# EAGLE board sodaled_panelized (EAGLE 6.3)
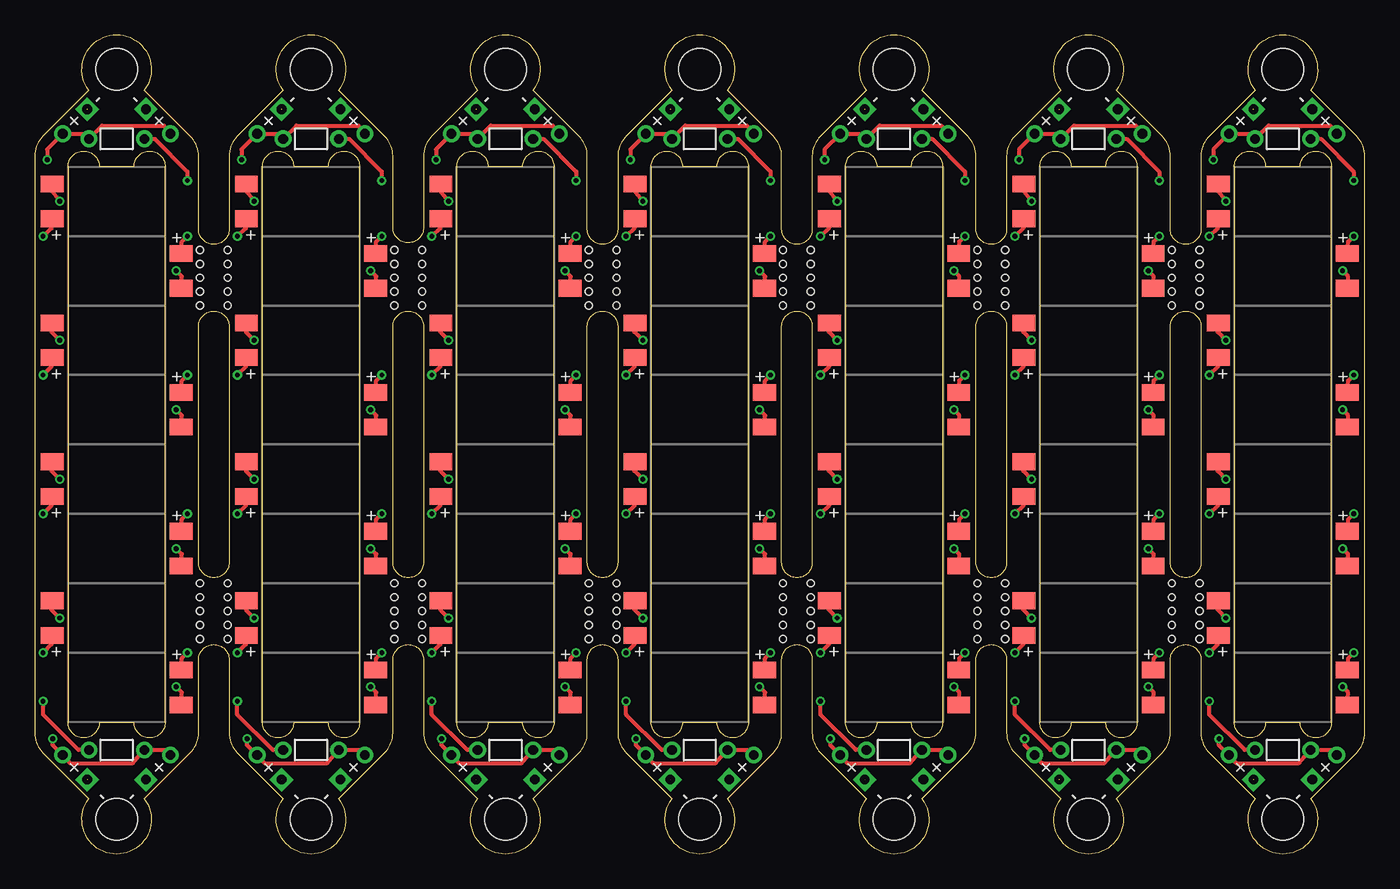
[diagram p0: board, top side]
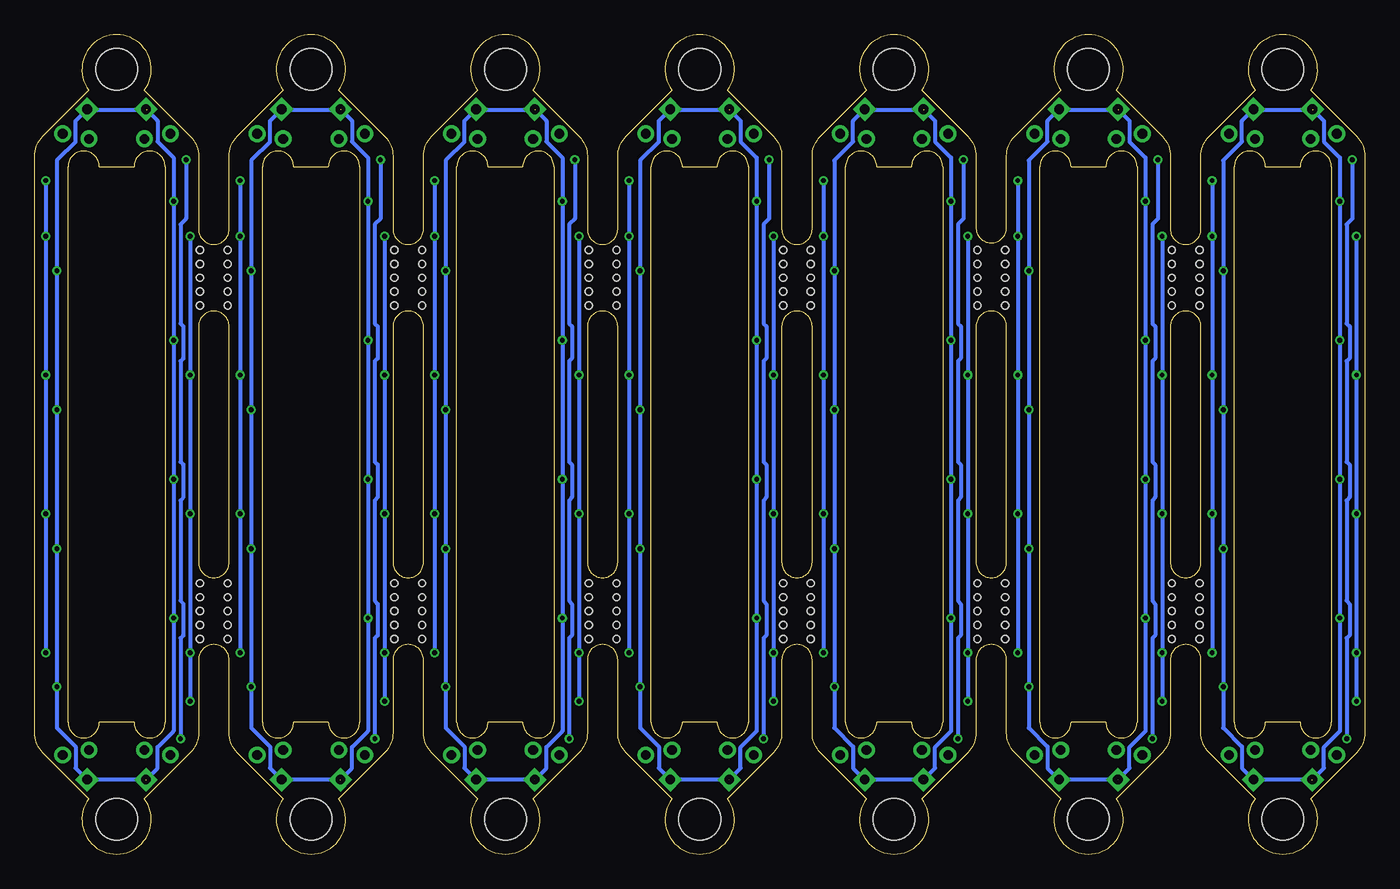
[diagram p1: board, bottom side, seen from below]

Size 95.8 x 59 mm. Coordinates in mm from the lower left corner, seen from the top.
Outline: 3.9,55 0.59,51.69 arc45 0,50.27 0,8.73 arc45 0.59,7.31 3.9,4 arc254 7.9,4 11.21,7.31 arc45 11.8,8.73 11.8,14 arc-180 14,14 14,8.73 arc45 14.59,7.31 17.9,4 arc254 21.9,4 25.21,7.31 arc45 25.8,8.73 25.8,14 arc-180 28,14 28,8.73 arc45 28.59,7.31 31.9,4 arc254 35.9,4 39.21,7.31 arc45 39.8,8.73 39.8,14 arc-180 42,14 42,8.73 arc45 42.59,7.31 45.9,4 arc254 49.9,4 53.21,7.31 arc45 53.8,8.73 53.8,14 arc-180 56,14 56,8.73 arc45 56.59,7.31 59.9,4 arc254 63.9,4 67.21,7.31 arc45 67.8,8.73 67.8,14 arc-180 70,14 70,8.73 arc45 70.59,7.31 73.9,4 arc254 77.9,4 81.21,7.31 arc45 81.8,8.73 81.8,14 arc-180 84,14 84,8.73 arc45 84.59,7.31 87.9,4 arc254 91.9,4 95.21,7.31 arc45 95.8,8.73 95.8,50.27 arc45 95.21,51.69 91.9,55 arc254 87.9,55 84.59,51.69 arc45 84,50.27 84,45 arc-180 81.8,45 81.8,50.27 arc45 81.21,51.69 77.9,55 arc254 73.9,55 70.59,51.69 arc45 70,50.27 70,45 arc-180 67.8,45 67.8,50.27 arc45 67.21,51.69 63.9,55 arc254 59.9,55 56.59,51.69 arc45 56,50.27 56,45 arc-180 53.8,45 53.8,50.27 arc45 53.21,51.69 49.9,55 arc254 45.9,55 42.59,51.69 arc45 42,50.27 42,45 arc-180 39.8,45 39.8,50.27 arc45 39.21,51.69 35.9,55 arc254 31.9,55 28.59,51.69 arc45 28,50.27 28,45.25 arc-180 25.8,45 25.8,50.27 arc45 25.21,51.69 21.9,55 arc254 17.9,55 14.59,51.69 arc45 14,50.27 14,45 arc-180 11.8,45 11.8,50.27 arc45 11.21,51.69 7.9,55 arc254 3.9,55
Outline: 11.8,21 11.8,38 arc-180 14,38 14,21 arc-180 11.8,21
Outline: 2.4,49.5 2.4,9.5 arc180 4.65,9.5 7.15,9.5 arc180 9.4,9.5 9.4,49.5 arc180 7.15,49.5 4.65,49.5 arc180 2.4,49.5
Outline: 25.8,21 25.8,38 arc-180 28,38 28,21 arc-180 25.8,21
Outline: 16.4,49.5 16.4,9.5 arc180 18.65,9.5 21.15,9.5 arc180 23.4,9.5 23.4,49.5 arc180 21.15,49.5 18.65,49.5 arc180 16.4,49.5
Outline: 39.8,21 39.8,38 arc-180 42,38 42,21 arc-180 39.8,21
Outline: 30.4,49.5 30.4,9.5 arc180 32.65,9.5 35.15,9.5 arc180 37.4,9.5 37.4,49.5 arc180 35.15,49.5 32.65,49.5 arc180 30.4,49.5
Outline: 53.8,21 53.8,38 arc-180 56,38 56,21 arc-180 53.8,21
Outline: 44.4,49.5 44.4,9.5 arc180 46.65,9.5 49.15,9.5 arc180 51.4,9.5 51.4,49.5 arc180 49.15,49.5 46.65,49.5 arc180 44.4,49.5
Outline: 67.8,21 67.8,38 arc-180 70,38 70,21 arc-180 67.8,21
Outline: 58.4,49.5 58.4,9.5 arc180 60.65,9.5 63.15,9.5 arc180 65.4,9.5 65.4,49.5 arc180 63.15,49.5 60.65,49.5 arc180 58.4,49.5
Outline: 81.8,21 81.8,38 arc-180 84,38 84,21 arc-180 81.8,21
Outline: 72.4,49.5 72.4,9.5 arc180 74.65,9.5 77.15,9.5 arc180 79.4,9.5 79.4,49.5 arc180 77.15,49.5 74.65,49.5 arc180 72.4,49.5
Outline: 86.4,49.5 86.4,9.5 arc180 88.65,9.5 91.15,9.5 arc180 93.4,9.5 93.4,49.5 arc180 91.15,49.5 88.65,49.5 arc180 86.4,49.5
Copper layers (1*16): Top 0.035mm / dielectric 1.5mm / Bottom 0.035mm
Design rules "ITEADstudio_DRC": minimum track width 6mil, minimum drill 12mil, track to track 6mil, track to pad 6mil, pad to pad 6mil, via to via 6mil, smd to smd 0mil, copper to edge 10mil, drill to drill 10mil, minimum pad ring 10mil, minimum via ring 6mil, stop-mask expansion 2mil, vias tented up to drill 100mil, thermal gap 10mil
Holes 3 mm at 5.9,2.5 5.9,56.5 19.9,2.5 19.9,56.5 33.9,2.5 33.9,56.5 47.9,2.5 47.9,56.5 61.9,2.5 61.9,56.5 75.9,2.5 75.9,56.5 89.9,2.5 89.9,56.5
Holes 0.5 mm at 11.9,15.5 11.9,16.5 11.9,17.5 11.9,18.5 11.9,19.5 13.9,15.5 13.9,16.5 13.9,17.5 13.9,18.5 13.9,19.5 11.9,39.5 11.9,40.5 11.9,41.5 11.9,42.5 11.9,43.5 13.9,39.5 13.9,40.5 13.9,41.5 13.9,42.5 13.9,43.5 25.9,15.5 25.9,16.5 25.9,17.5 25.9,18.5 25.9,19.5 27.9,15.5 27.9,16.5 27.9,17.5 27.9,18.5 27.9,19.5 25.9,39.5 25.9,40.5 25.9,41.5 25.9,42.5 25.9,43.5 27.9,39.5 27.9,40.5 27.9,41.5 27.9,42.5 27.9,43.5 39.9,15.5 39.9,16.5 39.9,17.5 39.9,18.5 39.9,19.5 41.9,15.5 41.9,16.5 41.9,17.5 41.9,18.5 41.9,19.5 39.9,39.5 39.9,40.5 39.9,41.5 39.9,42.5 39.9,43.5 41.9,39.5 41.9,40.5 41.9,41.5 41.9,42.5 41.9,43.5 53.9,15.5 53.9,16.5 53.9,17.5 53.9,18.5 53.9,19.5 55.9,15.5 55.9,16.5 55.9,17.5 55.9,18.5 55.9,19.5 53.9,39.5 53.9,40.5 53.9,41.5 53.9,42.5 53.9,43.5 55.9,39.5 55.9,40.5 55.9,41.5 55.9,42.5 55.9,43.5 67.9,15.5 67.9,16.5 67.9,17.5 67.9,18.5 67.9,19.5 69.9,15.5 69.9,16.5 69.9,17.5 69.9,18.5 69.9,19.5 67.9,39.5 67.9,40.5 67.9,41.5 67.9,42.5 67.9,43.5 69.9,39.5 69.9,40.5 69.9,41.5 69.9,42.5 69.9,43.5 81.9,15.5 81.9,16.5 81.9,17.5 81.9,18.5 81.9,19.5 83.9,15.5 83.9,16.5 83.9,17.5 83.9,18.5 83.9,19.5 81.9,39.5 81.9,40.5 81.9,41.5 81.9,42.5 81.9,43.5 83.9,39.5 83.9,40.5 83.9,41.5 83.9,42.5 83.9,43.5

## Footprints (pad centres in the part's own frame; a part is rotated, then mirrored left to right if it is on the bottom)
LED_RECT_SIDEMOUNT = smd 1.65 x 1.2: A -4.65,-1.25; C -4.65,1.25
1X02 = drill 0.7 square: P$1 -1.25,0 | drill 0.7: P$2 1.25,0
RESISTOR_CFM1 = drill 0.7: P$1 2,0; P$2 -2,0

## Placement (x,y rotation side)
LED1  [LED_RECT_SIDEMOUNT]  5.9,47 0 top
LED2  [LED_RECT_SIDEMOUNT]  5.9,42 180 top
LED3  [LED_RECT_SIDEMOUNT]  5.9,37 0 top
LED4  [LED_RECT_SIDEMOUNT]  5.9,32 180 top
LED5  [LED_RECT_SIDEMOUNT]  5.9,27 0 top
LED6  [LED_RECT_SIDEMOUNT]  5.9,22 180 top
LED7  [LED_RECT_SIDEMOUNT]  5.9,17 0 top
LED8  [LED_RECT_SIDEMOUNT]  5.9,12 180 top
LED9  [LED_RECT_SIDEMOUNT]  19.9,47 0 top
LED10  [LED_RECT_SIDEMOUNT]  19.9,42 180 top
LED11  [LED_RECT_SIDEMOUNT]  19.9,37 0 top
LED12  [LED_RECT_SIDEMOUNT]  19.9,32 180 top
LED13  [LED_RECT_SIDEMOUNT]  19.9,27 0 top
LED14  [LED_RECT_SIDEMOUNT]  19.9,22 180 top
LED15  [LED_RECT_SIDEMOUNT]  19.9,17 0 top
LED16  [LED_RECT_SIDEMOUNT]  19.9,12 180 top
LED17  [LED_RECT_SIDEMOUNT]  33.9,47 0 top
LED18  [LED_RECT_SIDEMOUNT]  33.9,42 180 top
LED19  [LED_RECT_SIDEMOUNT]  33.9,37 0 top
LED20  [LED_RECT_SIDEMOUNT]  33.9,32 180 top
LED21  [LED_RECT_SIDEMOUNT]  33.9,27 0 top
LED22  [LED_RECT_SIDEMOUNT]  33.9,22 180 top
LED23  [LED_RECT_SIDEMOUNT]  33.9,17 0 top
LED24  [LED_RECT_SIDEMOUNT]  33.9,12 180 top
LED25  [LED_RECT_SIDEMOUNT]  47.9,47 0 top
LED26  [LED_RECT_SIDEMOUNT]  47.9,42 180 top
LED27  [LED_RECT_SIDEMOUNT]  47.9,37 0 top
LED28  [LED_RECT_SIDEMOUNT]  47.9,32 180 top
LED29  [LED_RECT_SIDEMOUNT]  47.9,27 0 top
LED30  [LED_RECT_SIDEMOUNT]  47.9,22 180 top
LED31  [LED_RECT_SIDEMOUNT]  47.9,17 0 top
LED32  [LED_RECT_SIDEMOUNT]  47.9,12 180 top
LED33  [LED_RECT_SIDEMOUNT]  61.9,47 0 top
LED34  [LED_RECT_SIDEMOUNT]  61.9,42 180 top
LED35  [LED_RECT_SIDEMOUNT]  61.9,37 0 top
LED36  [LED_RECT_SIDEMOUNT]  61.9,32 180 top
LED37  [LED_RECT_SIDEMOUNT]  61.9,27 0 top
LED38  [LED_RECT_SIDEMOUNT]  61.9,22 180 top
LED39  [LED_RECT_SIDEMOUNT]  61.9,17 0 top
LED40  [LED_RECT_SIDEMOUNT]  61.9,12 180 top
LED41  [LED_RECT_SIDEMOUNT]  75.9,47 0 top
LED42  [LED_RECT_SIDEMOUNT]  75.9,42 180 top
LED43  [LED_RECT_SIDEMOUNT]  75.9,37 0 top
LED44  [LED_RECT_SIDEMOUNT]  75.9,32 180 top
LED45  [LED_RECT_SIDEMOUNT]  75.9,27 0 top
LED46  [LED_RECT_SIDEMOUNT]  75.9,22 180 top
LED47  [LED_RECT_SIDEMOUNT]  75.9,17 0 top
LED48  [LED_RECT_SIDEMOUNT]  75.9,12 180 top
LED49  [LED_RECT_SIDEMOUNT]  89.9,47 0 top
LED50  [LED_RECT_SIDEMOUNT]  89.9,42 180 top
LED51  [LED_RECT_SIDEMOUNT]  89.9,37 0 top
LED52  [LED_RECT_SIDEMOUNT]  89.9,32 180 top
LED53  [LED_RECT_SIDEMOUNT]  89.9,27 0 top
LED54  [LED_RECT_SIDEMOUNT]  89.9,22 180 top
LED55  [LED_RECT_SIDEMOUNT]  89.9,17 0 top
LED56  [LED_RECT_SIDEMOUNT]  89.9,12 180 top
U$1  M02  [1X02]  2.9,6.25 135 top
U$2  M02  [1X02]  8.9,6.25 45 top
U$3  M02  [1X02]  2.9,52.75 225 top
U$4  M02  [1X02]  8.9,52.75 315 top
U$5  M02  [1X02]  16.9,6.25 135 top
U$6  M02  [1X02]  22.9,6.25 45 top
U$7  120R  [RESISTOR_CFM1]  5.9,7.5 0 top
U$8  120R  [RESISTOR_CFM1]  5.9,51.5 180 top
U$9  M02  [1X02]  16.9,52.75 225 top
U$10  M02  [1X02]  22.9,52.75 315 top
U$11  120R  [RESISTOR_CFM1]  19.9,7.5 0 top
U$12  120R  [RESISTOR_CFM1]  19.9,51.5 180 top
U$13  M02  [1X02]  30.9,6.25 135 top
U$14  M02  [1X02]  36.9,6.25 45 top
U$15  M02  [1X02]  30.9,52.75 225 top
U$16  M02  [1X02]  36.9,52.75 315 top
U$17  120R  [RESISTOR_CFM1]  33.9,7.5 0 top
U$18  120R  [RESISTOR_CFM1]  33.9,51.5 180 top
U$19  M02  [1X02]  44.9,6.25 135 top
U$20  M02  [1X02]  50.9,6.25 45 top
U$21  M02  [1X02]  44.9,52.75 225 top
U$22  M02  [1X02]  50.9,52.75 315 top
U$23  120R  [RESISTOR_CFM1]  47.9,7.5 0 top
U$24  120R  [RESISTOR_CFM1]  47.9,51.5 180 top
U$25  M02  [1X02]  58.9,6.25 135 top
U$26  M02  [1X02]  64.9,6.25 45 top
U$27  M02  [1X02]  58.9,52.75 225 top
U$28  M02  [1X02]  64.9,52.75 315 top
U$29  120R  [RESISTOR_CFM1]  61.9,7.5 0 top
U$30  120R  [RESISTOR_CFM1]  61.9,51.5 180 top
U$31  M02  [1X02]  72.9,6.25 135 top
U$32  M02  [1X02]  78.9,6.25 45 top
U$33  M02  [1X02]  72.9,52.75 225 top
U$34  M02  [1X02]  78.9,52.75 315 top
U$35  120R  [RESISTOR_CFM1]  75.9,7.5 0 top
U$36  120R  [RESISTOR_CFM1]  75.9,51.5 180 top
U$37  M02  [1X02]  86.9,6.25 135 top
U$38  M02  [1X02]  92.9,6.25 45 top
U$39  M02  [1X02]  86.9,52.75 225 top
U$40  M02  [1X02]  92.9,52.75 315 top
U$41  120R  [RESISTOR_CFM1]  89.9,7.5 0 top
U$42  120R  [RESISTOR_CFM1]  89.9,51.5 180 top

## Library data of the parts
LED1-LED56 U$1-U$42 = tiago

## Nets
7.4V: U$1.P$2 U$2.P$2 U$3.P$2 U$4.P$2 U$7.P$1 U$8.P$1
7.4V1: U$5.P$2 U$6.P$2 U$9.P$2 U$10.P$2 U$11.P$1 U$12.P$1
7.4V2: U$13.P$2 U$14.P$2 U$15.P$2 U$16.P$2 U$17.P$1 U$18.P$1
7.4V3: U$19.P$2 U$20.P$2 U$21.P$2 U$22.P$2 U$23.P$1 U$24.P$1
7.4V4: U$25.P$2 U$26.P$2 U$27.P$2 U$28.P$2 U$29.P$1 U$30.P$1
7.4V5: U$31.P$2 U$32.P$2 U$33.P$2 U$34.P$2 U$35.P$1 U$36.P$1
7.4V6: U$37.P$2 U$38.P$2 U$39.P$2 U$40.P$2 U$41.P$1 U$42.P$1
GND: LED1.C LED2.C LED3.C LED4.C LED5.C LED6.C LED7.C LED8.C U$1.P$1 U$2.P$1 U$3.P$1 U$4.P$1
GND1: LED9.C LED10.C LED11.C LED12.C LED13.C LED14.C LED15.C LED16.C U$5.P$1 U$6.P$1 U$9.P$1 U$10.P$1
GND2: LED17.C LED18.C LED19.C LED20.C LED21.C LED22.C LED23.C LED24.C U$13.P$1 U$14.P$1 U$15.P$1 U$16.P$1
GND3: LED25.C LED26.C LED27.C LED28.C LED29.C LED30.C LED31.C LED32.C U$19.P$1 U$20.P$1 U$21.P$1 U$22.P$1
GND4: LED33.C LED34.C LED35.C LED36.C LED37.C LED38.C LED39.C LED40.C U$25.P$1 U$26.P$1 U$27.P$1 U$28.P$1
GND5: LED41.C LED42.C LED43.C LED44.C LED45.C LED46.C LED47.C LED48.C U$31.P$1 U$32.P$1 U$33.P$1 U$34.P$1
GND6: LED49.C LED50.C LED51.C LED52.C LED53.C LED54.C LED55.C LED56.C U$37.P$1 U$38.P$1 U$39.P$1 U$40.P$1
N$1: LED9.A LED11.A LED13.A LED15.A U$11.P$2
N$2: LED1.A LED3.A LED5.A LED7.A U$7.P$2
N$3: LED2.A LED4.A LED6.A LED8.A U$8.P$2
N$4: LED10.A LED12.A LED14.A LED16.A U$12.P$2
N$5: LED17.A LED19.A LED21.A LED23.A U$17.P$2
N$6: LED18.A LED20.A LED22.A LED24.A U$18.P$2
N$7: LED25.A LED27.A LED29.A LED31.A U$23.P$2
N$8: LED26.A LED28.A LED30.A LED32.A U$24.P$2
N$9: LED33.A LED35.A LED37.A LED39.A U$29.P$2
N$10: LED34.A LED36.A LED38.A LED40.A U$30.P$2
N$11: LED41.A LED43.A LED45.A LED47.A U$35.P$2
N$12: LED42.A LED44.A LED46.A LED48.A U$36.P$2
N$13: LED49.A LED51.A LED53.A LED55.A U$41.P$2
N$14: LED50.A LED52.A LED54.A LED56.A U$42.P$2

## Tracks (layer width: path | path; a pad name or v marks a point on that pad's centre or on a via)
7.4V  (via drill 0.35)
  Top 0.305: v0.9,50 0.9,50.75 U$3.P$2 3.43,51.87 U$8.P$1 4.85,52.45 9.3,52.45 9.78,51.97 U$4.P$2 | v1.3,8.3 1.3,7.85 U$1.P$2 2.55,6.55 7.05,6.55 7.9,7.55 U$7.P$1 9.42,7.5 U$2.P$2
  Bottom 0.305: v0.9,50 0.9,45.75 1.3,45.35 1.3,38.2 1.1,38 1.1,35.7 1.3,35.5 1.3,28.25 1.1,28.05 1.1,25.7 1.3,25.45 1.3,18.25 1.1,18 1.1,15.75 1.3,15.55 v1.3,8.3
7.4V1  (via drill 0.35)
  Top 0.305: v14.9,50 14.9,50.75 U$9.P$2 17.43,51.87 U$12.P$1 18.85,52.45 23.3,52.45 23.78,51.97 U$10.P$2 | v15.3,8.3 15.3,7.85 U$5.P$2 16.55,6.55 21.05,6.55 21.9,7.55 U$11.P$1 23.42,7.5 U$6.P$2
  Bottom 0.305: v14.9,50 14.9,45.75 15.3,45.35 15.3,38.2 15.1,38 15.1,35.7 15.3,35.5 15.3,28.25 15.1,28.05 15.1,25.7 15.3,25.45 15.3,18.25 15.1,18 15.1,15.75 15.3,15.55 v15.3,8.3
7.4V2  (via drill 0.35)
  Top 0.305: v28.9,50 28.9,50.75 U$15.P$2 31.43,51.87 U$18.P$1 32.85,52.45 37.3,52.45 37.78,51.97 U$16.P$2 | v29.3,8.3 29.3,7.85 U$13.P$2 30.55,6.55 35.05,6.55 35.9,7.55 U$17.P$1 37.42,7.5 U$14.P$2
  Bottom 0.305: v28.9,50 28.9,45.75 29.3,45.35 29.3,38.2 29.1,38 29.1,35.7 29.3,35.5 29.3,28.25 29.1,28.05 29.1,25.7 29.3,25.45 29.3,18.25 29.1,18 29.1,15.75 29.3,15.55 v29.3,8.3
7.4V3  (via drill 0.35)
  Top 0.305: v42.9,50 42.9,50.75 U$21.P$2 45.43,51.87 U$24.P$1 46.85,52.45 51.3,52.45 51.78,51.97 U$22.P$2 | v43.3,8.3 43.3,7.85 U$19.P$2 44.55,6.55 49.05,6.55 49.9,7.55 U$23.P$1 51.42,7.5 U$20.P$2
  Bottom 0.305: v42.9,50 42.9,45.75 43.3,45.35 43.3,38.2 43.1,38 43.1,35.7 43.3,35.5 43.3,28.25 43.1,28.05 43.1,25.7 43.3,25.45 43.3,18.25 43.1,18 43.1,15.75 43.3,15.55 v43.3,8.3
7.4V4  (via drill 0.35)
  Top 0.305: v56.9,50 56.9,50.75 U$27.P$2 59.43,51.87 U$30.P$1 60.85,52.45 65.3,52.45 65.78,51.97 U$28.P$2 | v57.3,8.3 57.3,7.85 U$25.P$2 58.55,6.55 63.05,6.55 63.9,7.55 U$29.P$1 65.42,7.5 U$26.P$2
  Bottom 0.305: v56.9,50 56.9,45.75 57.3,45.35 57.3,38.2 57.1,38 57.1,35.7 57.3,35.5 57.3,28.25 57.1,28.05 57.1,25.7 57.3,25.45 57.3,18.25 57.1,18 57.1,15.75 57.3,15.55 v57.3,8.3
7.4V5  (via drill 0.35)
  Top 0.305: v70.9,50 70.9,50.75 U$33.P$2 73.43,51.87 U$36.P$1 74.85,52.45 79.3,52.45 79.78,51.97 U$34.P$2 | v71.3,8.3 71.3,7.85 U$31.P$2 72.55,6.55 77.05,6.55 77.9,7.55 U$35.P$1 79.42,7.5 U$32.P$2
  Bottom 0.305: v70.9,50 70.9,45.75 71.3,45.35 71.3,38.2 71.1,38 71.1,35.7 71.3,35.5 71.3,28.25 71.1,28.05 71.1,25.7 71.3,25.45 71.3,18.25 71.1,18 71.1,15.75 71.3,15.55 v71.3,8.3
7.4V6  (via drill 0.35)
  Top 0.305: v84.9,50 84.9,50.75 U$39.P$2 87.43,51.87 U$42.P$1 88.85,52.45 93.3,52.45 93.78,51.97 U$40.P$2 | v85.3,8.3 85.3,7.85 U$37.P$2 86.55,6.55 91.05,6.55 91.9,7.55 U$41.P$1 93.42,7.5 U$38.P$2
  Bottom 0.305: v84.9,50 84.9,45.75 85.3,45.35 85.3,38.2 85.1,38 85.1,35.7 85.3,35.5 85.3,28.25 85.1,28.05 85.1,25.7 85.3,25.45 85.3,18.25 85.1,18 85.1,15.75 85.3,15.55 v85.3,8.3
GND  (via drill 0.35)  (2 unrouted)
  Top 0.305: LED1.C 1.25,47.7 v1.8,47 | LED3.C 1.2,37.6 v1.8,37 | LED5.C 1.2,27.6 v1.8,27 | LED7.C 1.2,17.6 v1.8,17 | LED2.C 10.6,41.6 v10.2,42 | LED4.C 10.6,31.6 v10.2,32 | LED6.C 10.6,21.6 v10.2,22 | LED8.C 10.6,11.65 v10.2,12.05
  Bottom 0.305: U$1.P$1 2.95,6.2 2.95,7.7 1.8,8.85 v1.8,17 v1.8,27 v1.8,37 v1.8,47 1.8,50.15 2.95,51.3 2.95,52.8 U$3.P$1 | U$4.P$1 8.85,52.8 8.85,51.3 10.2,49.95 v10.2,42 v10.2,32 v10.2,22 v10.2,12.05 10.2,9.1 8.85,7.75 8.85,6.2 U$2.P$1 3.82,5.37 3.8,5.35 | 8.05,53.6 3.75,53.6
GND1  (via drill 0.35)  (2 unrouted)
  Top 0.305: LED9.C 15.25,47.7 v15.8,47 | LED11.C 15.2,37.6 v15.8,37 | LED13.C 15.2,27.6 v15.8,27 | LED15.C 15.2,17.6 v15.8,17 | LED10.C 24.6,41.6 v24.2,42 | LED12.C 24.6,31.6 v24.2,32 | LED14.C 24.6,21.6 v24.2,22 | LED16.C 24.6,11.65 v24.2,12.05
  Bottom 0.305: U$5.P$1 16.95,6.2 16.95,7.7 15.8,8.85 v15.8,17 v15.8,27 v15.8,37 v15.8,47 15.8,50.15 16.95,51.3 16.95,52.8 U$9.P$1 | U$10.P$1 22.85,52.8 22.85,51.3 24.2,49.95 v24.2,42 v24.2,32 v24.2,22 v24.2,12.05 24.2,9.1 22.85,7.75 22.85,6.2 U$6.P$1 17.82,5.37 17.8,5.35 | 22.05,53.6 17.75,53.6
GND2  (via drill 0.35)  (2 unrouted)
  Top 0.305: LED17.C 29.25,47.7 v29.8,47 | LED19.C 29.2,37.6 v29.8,37 | LED21.C 29.2,27.6 v29.8,27 | LED23.C 29.2,17.6 v29.8,17 | LED18.C 38.6,41.6 v38.2,42 | LED20.C 38.6,31.6 v38.2,32 | LED22.C 38.6,21.6 v38.2,22 | LED24.C 38.6,11.65 v38.2,12.05
  Bottom 0.305: U$13.P$1 30.95,6.2 30.95,7.7 29.8,8.85 v29.8,17 v29.8,27 v29.8,37 v29.8,47 29.8,50.15 30.95,51.3 30.95,52.8 U$15.P$1 | U$16.P$1 36.85,52.8 36.85,51.3 38.2,49.95 v38.2,42 v38.2,32 v38.2,22 v38.2,12.05 38.2,9.1 36.85,7.75 36.85,6.2 U$14.P$1 31.82,5.37 31.8,5.35 | 36.05,53.6 31.75,53.6
GND3  (via drill 0.35)  (2 unrouted)
  Top 0.305: LED25.C 43.25,47.7 v43.8,47 | LED27.C 43.2,37.6 v43.8,37 | LED29.C 43.2,27.6 v43.8,27 | LED31.C 43.2,17.6 v43.8,17 | LED26.C 52.6,41.6 v52.2,42 | LED28.C 52.6,31.6 v52.2,32 | LED30.C 52.6,21.6 v52.2,22 | LED32.C 52.6,11.65 v52.2,12.05
  Bottom 0.305: U$19.P$1 44.95,6.2 44.95,7.7 43.8,8.85 v43.8,17 v43.8,27 v43.8,37 v43.8,47 43.8,50.15 44.95,51.3 44.95,52.8 U$21.P$1 | U$22.P$1 50.85,52.8 50.85,51.3 52.2,49.95 v52.2,42 v52.2,32 v52.2,22 v52.2,12.05 52.2,9.1 50.85,7.75 50.85,6.2 U$20.P$1 45.82,5.37 45.8,5.35 | 50.05,53.6 45.75,53.6
GND4  (via drill 0.35)  (2 unrouted)
  Top 0.305: LED33.C 57.25,47.7 v57.8,47 | LED35.C 57.2,37.6 v57.8,37 | LED37.C 57.2,27.6 v57.8,27 | LED39.C 57.2,17.6 v57.8,17 | LED34.C 66.6,41.6 v66.2,42 | LED36.C 66.6,31.6 v66.2,32 | LED38.C 66.6,21.6 v66.2,22 | LED40.C 66.6,11.65 v66.2,12.05
  Bottom 0.305: U$25.P$1 58.95,6.2 58.95,7.7 57.8,8.85 v57.8,17 v57.8,27 v57.8,37 v57.8,47 57.8,50.15 58.95,51.3 58.95,52.8 U$27.P$1 | U$28.P$1 64.85,52.8 64.85,51.3 66.2,49.95 v66.2,42 v66.2,32 v66.2,22 v66.2,12.05 66.2,9.1 64.85,7.75 64.85,6.2 U$26.P$1 59.82,5.37 59.8,5.35 | 64.05,53.6 59.75,53.6
GND5  (via drill 0.35)  (2 unrouted)
  Top 0.305: LED41.C 71.25,47.7 v71.8,47 | LED43.C 71.2,37.6 v71.8,37 | LED45.C 71.2,27.6 v71.8,27 | LED47.C 71.2,17.6 v71.8,17 | LED42.C 80.6,41.6 v80.2,42 | LED44.C 80.6,31.6 v80.2,32 | LED46.C 80.6,21.6 v80.2,22 | LED48.C 80.6,11.65 v80.2,12.05
  Bottom 0.305: U$31.P$1 72.95,6.2 72.95,7.7 71.8,8.85 v71.8,17 v71.8,27 v71.8,37 v71.8,47 71.8,50.15 72.95,51.3 72.95,52.8 U$33.P$1 | U$34.P$1 78.85,52.8 78.85,51.3 80.2,49.95 v80.2,42 v80.2,32 v80.2,22 v80.2,12.05 80.2,9.1 78.85,7.75 78.85,6.2 U$32.P$1 73.82,5.37 73.8,5.35 | 78.05,53.6 73.75,53.6
GND6  (via drill 0.35)  (2 unrouted)
  Top 0.305: LED49.C 85.25,47.7 v85.8,47 | LED51.C 85.2,37.6 v85.8,37 | LED53.C 85.2,27.6 v85.8,27 | LED55.C 85.2,17.6 v85.8,17 | LED50.C 94.6,41.6 v94.2,42 | LED52.C 94.6,31.6 v94.2,32 | LED54.C 94.6,21.6 v94.2,22 | LED56.C 94.6,11.65 v94.2,12.05
  Bottom 0.305: U$37.P$1 86.95,6.2 86.95,7.7 85.8,8.85 v85.8,17 v85.8,27 v85.8,37 v85.8,47 85.8,50.15 86.95,51.3 86.95,52.8 U$39.P$1 | U$40.P$1 92.85,52.8 92.85,51.3 94.2,49.95 v94.2,42 v94.2,32 v94.2,22 v94.2,12.05 94.2,9.1 92.85,7.75 92.85,6.2 U$38.P$1 87.82,5.37 87.8,5.35 | 92.05,53.6 87.75,53.6
N$1  (via drill 0.35)
  Top 0.305: LED9.A 15.2,45.05 v14.6,44.5 | LED11.A 15.2,35.1 v14.6,34.5 | LED13.A 15.2,25.1 v14.6,24.5 | LED15.A 15.2,15.1 v14.6,14.5 | U$11.P$2 17.15,7.5 14.6,10.05 v14.6,11
  Bottom 0.305: v14.6,44.5 v14.6,34.5 v14.6,24.5 v14.6,14.5 v14.6,11
N$2  (via drill 0.35)
  Top 0.305: LED1.A 1.2,45.05 v0.6,44.5 | LED3.A 1.2,35.1 v0.6,34.5 | LED5.A 1.2,25.1 v0.6,24.5 | LED7.A 1.2,15.1 v0.6,14.5 | U$7.P$2 3.15,7.5 0.6,10.05 v0.6,11
  Bottom 0.305: v0.6,44.5 v0.6,34.5 v0.6,24.5 v0.6,14.5 v0.6,11
N$3  (via drill 0.35)
  Top 0.305: U$8.P$2 8.65,51.5 11,49.15 v11,48.5 | LED2.A 10.6,44.1 v11,44.5 | LED6.A 10.6,24.1 v11,24.5 | LED4.A 10.6,34.1 v11,34.5 | LED8.A 10.6,14.1 v11,14.5
  Bottom 0.305: v11,48.5 v11,44.5 v11,34.5 v11,24.5 v11,14.5
N$4  (via drill 0.35)
  Top 0.305: U$12.P$2 22.65,51.5 25,49.15 v25,48.5 | LED10.A 24.6,44.1 v25,44.5 | LED14.A 24.6,24.1 v25,24.5 | LED12.A 24.6,34.1 v25,34.5 | LED16.A 24.6,14.1 v25,14.5
  Bottom 0.305: v25,48.5 v25,44.5 v25,34.5 v25,24.5 v25,14.5
N$5  (via drill 0.35)
  Top 0.305: LED17.A 29.2,45.05 v28.6,44.5 | LED19.A 29.2,35.1 v28.6,34.5 | LED21.A 29.2,25.1 v28.6,24.5 | LED23.A 29.2,15.1 v28.6,14.5 | U$17.P$2 31.15,7.5 28.6,10.05 v28.6,11
  Bottom 0.305: v28.6,44.5 v28.6,34.5 v28.6,24.5 v28.6,14.5 v28.6,11
N$6  (via drill 0.35)
  Top 0.305: U$18.P$2 36.65,51.5 39,49.15 v39,48.5 | LED18.A 38.6,44.1 v39,44.5 | LED22.A 38.6,24.1 v39,24.5 | LED20.A 38.6,34.1 v39,34.5 | LED24.A 38.6,14.1 v39,14.5
  Bottom 0.305: v39,48.5 v39,44.5 v39,34.5 v39,24.5 v39,14.5
N$7  (via drill 0.35)
  Top 0.305: LED25.A 43.2,45.05 v42.6,44.5 | LED27.A 43.2,35.1 v42.6,34.5 | LED29.A 43.2,25.1 v42.6,24.5 | LED31.A 43.2,15.1 v42.6,14.5 | U$23.P$2 45.15,7.5 42.6,10.05 v42.6,11
  Bottom 0.305: v42.6,44.5 v42.6,34.5 v42.6,24.5 v42.6,14.5 v42.6,11
N$8  (via drill 0.35)
  Top 0.305: U$24.P$2 50.65,51.5 53,49.15 v53,48.5 | LED26.A 52.6,44.1 v53,44.5 | LED30.A 52.6,24.1 v53,24.5 | LED28.A 52.6,34.1 v53,34.5 | LED32.A 52.6,14.1 v53,14.5
  Bottom 0.305: v53,48.5 v53,44.5 v53,34.5 v53,24.5 v53,14.5
N$9  (via drill 0.35)
  Top 0.305: LED33.A 57.2,45.05 v56.6,44.5 | LED35.A 57.2,35.1 v56.6,34.5 | LED37.A 57.2,25.1 v56.6,24.5 | LED39.A 57.2,15.1 v56.6,14.5 | U$29.P$2 59.15,7.5 56.6,10.05 v56.6,11
  Bottom 0.305: v56.6,44.5 v56.6,34.5 v56.6,24.5 v56.6,14.5 v56.6,11
N$10  (via drill 0.35)
  Top 0.305: U$30.P$2 64.65,51.5 67,49.15 v67,48.5 | LED34.A 66.6,44.1 v67,44.5 | LED38.A 66.6,24.1 v67,24.5 | LED36.A 66.6,34.1 v67,34.5 | LED40.A 66.6,14.1 v67,14.5
  Bottom 0.305: v67,48.5 v67,44.5 v67,34.5 v67,24.5 v67,14.5
N$11  (via drill 0.35)
  Top 0.305: LED41.A 71.2,45.05 v70.6,44.5 | LED43.A 71.2,35.1 v70.6,34.5 | LED45.A 71.2,25.1 v70.6,24.5 | LED47.A 71.2,15.1 v70.6,14.5 | U$35.P$2 73.15,7.5 70.6,10.05 v70.6,11
  Bottom 0.305: v70.6,44.5 v70.6,34.5 v70.6,24.5 v70.6,14.5 v70.6,11
N$12  (via drill 0.35)
  Top 0.305: U$36.P$2 78.65,51.5 81,49.15 v81,48.5 | LED42.A 80.6,44.1 v81,44.5 | LED46.A 80.6,24.1 v81,24.5 | LED44.A 80.6,34.1 v81,34.5 | LED48.A 80.6,14.1 v81,14.5
  Bottom 0.305: v81,48.5 v81,44.5 v81,34.5 v81,24.5 v81,14.5
N$13  (via drill 0.35)
  Top 0.305: LED49.A 85.2,45.05 v84.6,44.5 | LED51.A 85.2,35.1 v84.6,34.5 | LED53.A 85.2,25.1 v84.6,24.5 | LED55.A 85.2,15.1 v84.6,14.5 | U$41.P$2 87.15,7.5 84.6,10.05 v84.6,11
  Bottom 0.305: v84.6,44.5 v84.6,34.5 v84.6,24.5 v84.6,14.5 v84.6,11
N$14  (via drill 0.35)
  Top 0.305: U$42.P$2 92.65,51.5 95,49.15 v95,48.5 | LED50.A 94.6,44.1 v95,44.5 | LED54.A 94.6,24.1 v95,24.5 | LED52.A 94.6,34.1 v95,34.5 | LED56.A 94.6,14.1 v95,14.5
  Bottom 0.305: v95,48.5 v95,44.5 v95,34.5 v95,24.5 v95,14.5

## Text on the board
tPlace: - | - | - | - | - | - | - | - | - | - | - | - | - | - | + | + | + | + | + | + | + | + | + | + | + | + | + | + | + | + | + | + | + | + | + | + | + | + | + | + | + | + | - | - | - | - | - | - | - | - | - | - | - | - | - | -